# Altium PCB MainBoard.PcbDoc
Units mil, origin at the board's own origin, x right, y up, seen from the top; angles counter-clockwise.
Board outline 2900 x 5900 mil, 2 copper layers (Top Layer, Bottom Layer); 84 components, 82 nets, 403 pads, 125 vias.
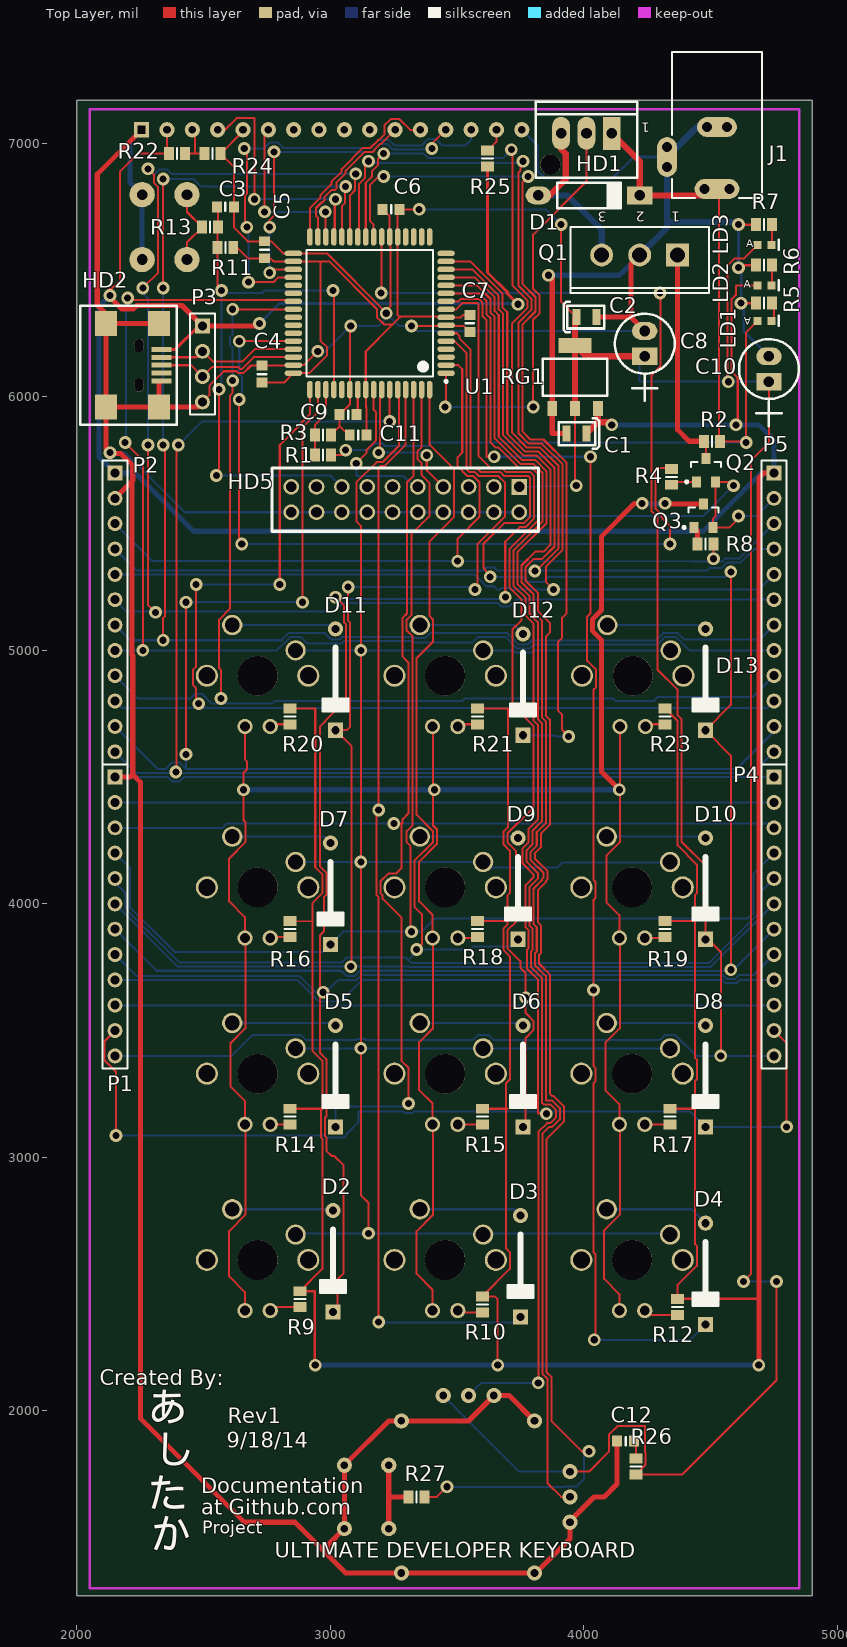
[diagram p0: Top Layer view]
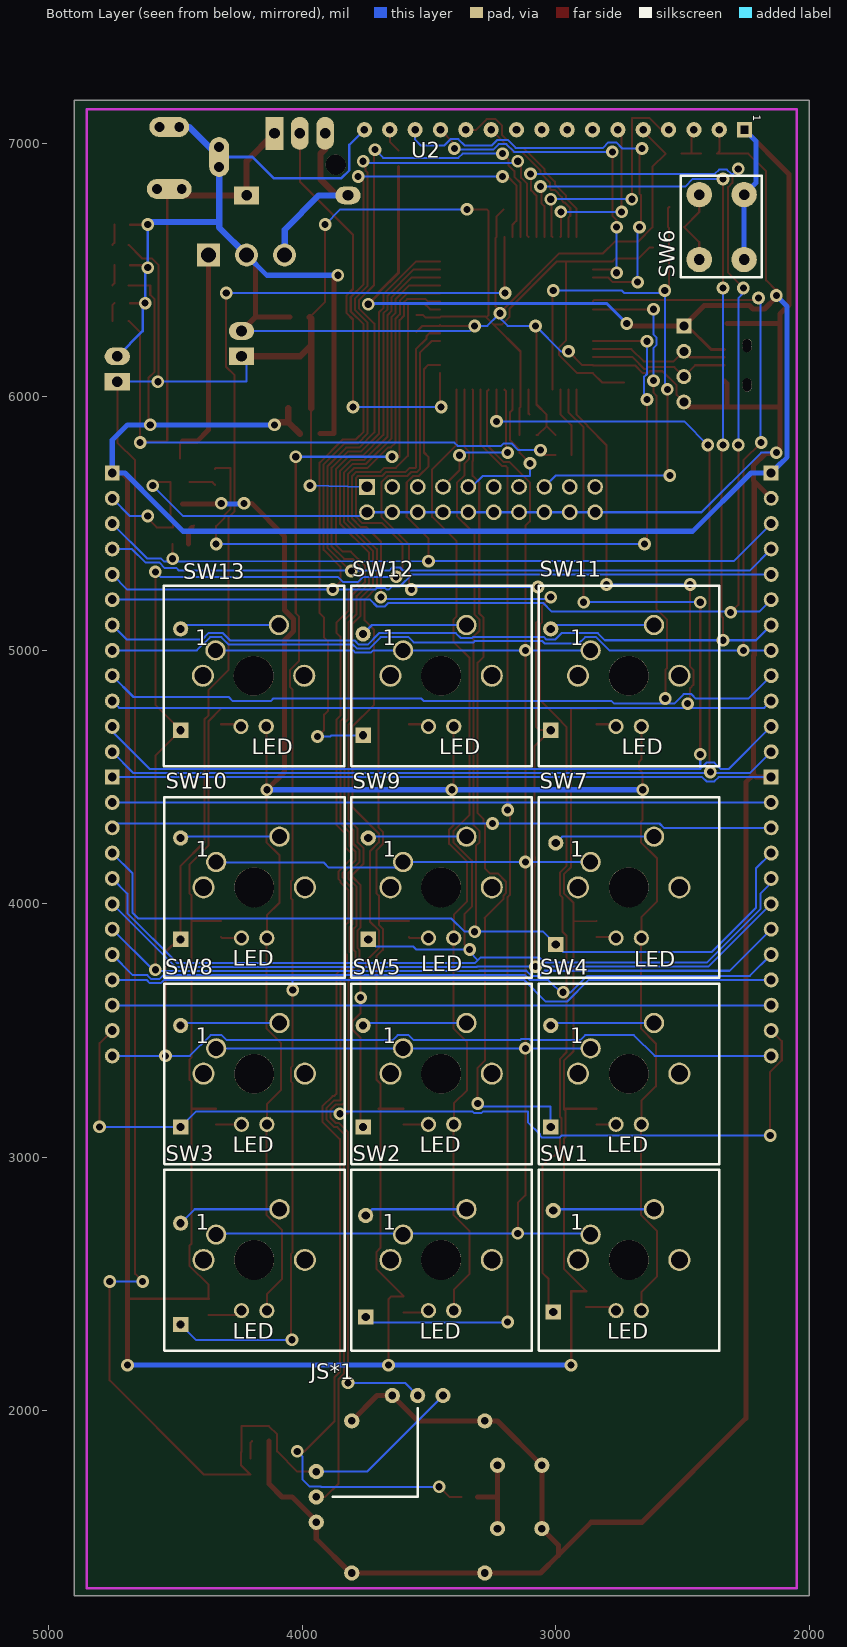
[diagram p1: Bottom Layer view, seen from below]

## Layer stack, top to bottom
Top Layer: signal copper 1.4
Dielectric: dielectric 12.6, FR-4, Dk 4.8
Bottom Layer: signal copper 1.4

## Board outline
2000,1270 4900,1270 4900,7170 2000,7170

## Design rules (kind name [scope] priority, off if disabled: settings)
Clearance [All] p1: gap=8
PolygonConnect [All] p1: connectstyle=Relief reliefconductorwidth=10 reliefentries=4 polygonreliefangle="90 Angle"
RoomDefinition MainBoard [InComponentClass('MainBoard')] p1: confinementstyle=ConfineIn formatcopy=TRUE lockcomponents=FALSE outline 4900,1270 2000,1270 2000,7170 4900,7170
RoutingVias [All] p1: holewidth=25 width=40 viastyle="Through Hole" minholewidth=28 minwidth=50 maxholewidth=28 maxwidth=50
SilkscreenOverComponentPads [All] p1: minsilkscreentomaskgap=10
SolderMaskExpansion [All] p1: expansion=4
Width [All] p1: maxlimit=25 minlimit=8 preferedwidth=8 minimp=50.000000 maximp=50.000000 favimp=50.000000
27 further rules are at their usual default settings.

## Components (designator, comment, footprint, x,y, rotation, side; value= is the part's Value field where it differs from the comment)
C1 "100UF_TANT_6.3V_0805" 100uF_6.3V_Tant_0805 3970,5855 r180 top
C2 "100UF_TANT_6.3V_0805" 100uF_6.3V_Tant_0805 4010,6315 r0 top
C3 "0.01UF_0603REFLOW" RC0603REFLOW-IPC 2585,6750 r0 top
C4 "0.01UF_0603REFLOW" RC0603REFLOW-IPC 2730,6090 r90 top
C5 "0.01UF_0603REFLOW" RC0603REFLOW-IPC 2740,6580 r90 top
C6 "0.01UF_0603REFLOW" RC0603REFLOW-IPC 3240,6740 r180 top
C7 "0.01UF_0603REFLOW" RC0603REFLOW-IPC 3550,6290 r270 top
C8 "10UF_RP_16V_100" CAP_100RP42_6MMDIA 4240,6160 r90 top
C9 "0.01UF_0603REFLOW" RC0603REFLOW-IPC 3070,5930 r180 top
C10 "10UF_RP_16V_100" CAP_100RP42_6MMDIA 4730,6060 r90 top
C11 "0.01UF_0603REFLOW" RC0603REFLOW-IPC 3110,5850 r180 top
C12 "0.01UF_0603REFLOW" RC0603REFLOW-IPC 4165,1880 r180 top
D1 "1N4001" DIODE400/70/42 4220,6795 r180 top
D2 "1N4148" DIODE400/60/32 3010,2390 r90 top
D3 "1N4148" DIODE400/60/32 3750,2370 r90 top
D4 "1N4148" DIODE400/60/32 4480,2340 r90 top
D5 "1N4148" DIODE400/60/32 3020,3120 r90 top
D6 "1N4148" DIODE400/60/32 3760,3120 r90 top
D7 "1N4148" DIODE400/60/32 3000,3840 r90 top
D8 "1N4148" DIODE400/60/32 4480,3120 r90 top
D9 "1N4148" DIODE400/60/32 3740,3860 r90 top
D10 "1N4148" DIODE400/60/32 4480,3860 r90 top
D11 "1N4148" DIODE400/60/32 3020,4685 r90 top
D12 "1N4148" DIODE400/60/32 3760,4665 r90 top
D13 "1N4148" DIODE400/60/32 4480,4685 r90 top
HD1 "HDR3PIN100SHRD" HDR3PIN100SHRD 4110,7040 r180 top
HD2 "USB-MINI_B" HD_USB_MINI_B 2245,6125 r270 top
HD5 "HDR,20PIN,2X10" HDR-20PIN-2X10 3745,5645 r180 top
J1 "PWR2.5" KLD-0202 4525,7360 r270 top
JS*1 "JoyStick" JOYSTICK 3280,1960 r270 bottom
LD1 "0603_RED" LED0603REFLOW-IPC-COLOR 4720,6300 r90 top
LD2 "0603_RED" LED0603REFLOW-IPC-COLOR 4720,6440 r90 top
LD3 "0603_RED" LED0603REFLOW-IPC-COLOR 4720,6600 r90 top
P1 "Header 12" HDR1X12 2150,4500 r270 top
P2 "Header 12" HDR1X12 2150,5700 r270 top
P3 "Header 4" HDR1X4 2495,6280 r270 top
P4 "Header 12" HDR1X12 4750,4500 r270 top
P5 "Header 12" HDR1X12 4750,5700 r270 top
Q1 "NPN_TRANSISTOR" SFM-T3/A6.6V 4220,6560 r180 top
Q2 "NPN_TRANSISTOR" SOT23-3 4445,5665 r90 top
Q3 "NPN_TRANSISTOR" SOT23-3 4435,5485 r90 top
R1 "Res Semi" RESC2012L 2970,5770 r0 top
R2 "Res Semi" RESC2012L 4505,5825 r0 top
R3 "Res Semi" RESC2012L 2970,5850 r180 top
R4 "Res Semi" RESC2012L 4345,5685 r270 top
R5 "Res Semi" RESC2012L 4710,6370 r0 top
R6 "Res Semi" RESC2012L 4710,6520 r0 top
R7 "Res Semi" RESC2012L 4710,6680 r0 top
R8 "Res Semi" RESC2012L 4480,5420 r180 top
R9 "Res Semi" RESC2012L 2880,2440 r270 top
R10 "Res Semi" RESC2012L 3600,2420 r270 top
R11 "Res Semi" RESC2012L 2585,6590 r0 top
R12 "Res Semi" RESC2012L 4370,2410 r270 top
R13 "Res Semi" RESC2012L 2525,6670 r180 top
R14 "Res Semi" RESC2012L 2840,3160 r270 top
R15 "Res Semi" RESC2012L 3600,3160 r270 top
R16 "Res Semi" RESC2012L 2840,3900 r270 top
R17 "Res Semi" RESC2012L 4340,3160 r270 top
R18 "Res Semi" RESC2012L 3580,3900 r270 top
R19 "Res Semi" RESC2012L 4320,3900 r270 top
R20 "Res Semi" RESC2012L 2840,4740 r270 top
R21 "Res Semi" RESC2012L 3580,4740 r270 top
R22 "Res Semi" RESC2012L 2395,6960 r180 top
R23 "Res Semi" RESC2012L 4320,4740 r270 top
R24 "Res Semi" RESC2012L 2535,6960 r180 top
R25 "Res Semi" RESC2012L 3620,6940 r270 top
R26 "Res Semi" RESC2012L 4205,1780 r270 top
R27 "Res Semi" RESC2012L 3340,1660 r0 top
RG1 "LM1117SPX-3.3_SOT223" SOT223REFLOW 3965,5955 r0 top
SW1 "CherrySwitch" CherryMxSwitch 2862.5,2695 r180 bottom
SW2 "CherrySwitch" CherryMxSwitch 3602.5,2695 r180 bottom
SW3 "CherrySwitch" CherryMxSwitch 4340,2695 r180 bottom
SW4 "CherrySwitch" CherryMxSwitch 2862.5,3430 r180 bottom
SW5 "CherrySwitch" CherryMxSwitch 3602.5,3430 r180 bottom
SW6 "SW-PCB-4P-6MM" SW-PCB-4PIN 2345,6670 r90 bottom
SW7 "CherrySwitch" CherryMxSwitch 2862.5,4165 r180 bottom
SW8 "CherrySwitch" CherryMxSwitch 4340,3430 r180 bottom
SW9 "CherrySwitch" CherryMxSwitch 3602.5,4165 r180 bottom
SW10 "CherrySwitch" CherryMxSwitch 4340,4165 r180 bottom
SW11 "CherrySwitch" CherryMxSwitch 2862.5,5000 r180 bottom
SW12 "CherrySwitch" CherryMxSwitch 3602.5,5000 r180 bottom
SW13 "CherrySwitch" CherryMxSwitch 4342.5,5000 r180 bottom
U1 "ATSAMD21J" 64A_N 3155,6330 r180 top
U2 "HD44780" HD44780 2255,7054 r270 bottom

## Footprints (in the part's own frame and the unit in brackets; to place one, negate y for a bottom-side part, rotate by r counter-clockwise, add the part's x,y. Pads: shape width x height; smd on the part's side, far side on the other; paste and mask are expansions set on the pad)
64A_N [mm] "64-Pin Thin Quad Flat Pack 0.8 mm Pitch, IPC Medium Density"
  oval 1.75x0.55 smd: 1(-7.65,6) 2(-7.65,5.2) 3(-7.65,4.4) 4(-7.65,3.6) 5(-7.65,2.8) 6(-7.65,2) 7(-7.65,1.2) 8(-7.65,0.4) 9(-7.65,-0.4) 10(-7.65,-1.2) 11(-7.65,-2) 12(-7.65,-2.8) 13(-7.65,-3.6) 14(-7.65,-4.4) 15(-7.65,-5.2) 16(-7.65,-6) 33(7.65,-6) 34(7.65,-5.2) 35(7.65,-4.4) 36(7.65,-3.6) 37(7.65,-2.8) 38(7.65,-2) 39(7.65,-1.2) 40(7.65,-0.4) 41(7.65,0.4) 42(7.65,1.2) 43(7.65,2) 44(7.65,2.8) 45(7.65,3.6) 46(7.65,4.4) 47(7.65,5.2) 48(7.65,6)
  oval 0.55x1.75 smd: 17(-6,-7.65) 18(-5.2,-7.65) 19(-4.4,-7.65) 20(-3.6,-7.65) 21(-2.8,-7.65) 22(-2,-7.65) 23(-1.2,-7.65) 24(-0.4,-7.65) 25(0.4,-7.65) 26(1.2,-7.65) 27(2,-7.65) 28(2.8,-7.65) 29(3.6,-7.65) 30(4.4,-7.65) 31(5.2,-7.65) 32(6,-7.65) 49(6,7.65) 50(5.2,7.65) 51(4.4,7.65) 52(3.6,7.65) 53(2.8,7.65) 54(2,7.65) 55(1.2,7.65) 56(0.4,7.65) 57(-0.4,7.65) 58(-1.2,7.65) 59(-2,7.65) 60(-2.8,7.65) 61(-3.6,7.65) 62(-4.4,7.65) 63(-5.2,7.65) 64(-6,7.65)
  silkscreen extent -7.78,-6.35 6.35,6.95, body extent -7,-7 7,7, height 1.2
100uF_6.3V_Tant_0805 [mm] "100uF 6.3V Tantalum 0805 package"
  rect 0.8x1.6 smd: 1(-1,0) 2(1,0)
  silkscreen extent -2.29,-1.52 1.78,1.52
CAP_100RP42_6MMDIA [mil]
  rect 70x100 hole 42: 1(0,0)
  oval 70x100 hole 42: 2(100,0)
  silkscreen extent -175,-118 168,118
CherryMxSwitch [mil] "Cherry Mx Switch with holes for LED"
  round 80 hole 59: 1(0,0) 2(250,100)
  round 60 hole 39: 3(100,-300) 4(200,-300)
  round 87 hole 67: 5(-50,-100) 7(350,-100)
  round 157 hole 157 unplated: 6(150,-100)
  silkscreen extent -205,-458 508,255
DIODE400/60/32 [mil]
  rect 60x60 hole 32: 1(0,0)
  round 60 hole 32: 2(400,0)
  silkscreen extent 75,-50 325,50
DIODE400/70/42 [mil]
  rect 100x70 hole 42: 1(0,0)
  oval 100x70 hole 42: 2(400,0)
  silkscreen extent 75,-50 325,50
HD44780 [mil] "HD44780 Display"
  rect 60x60 hole 30 square: 1(0,0)
  round 60 hole 30: 2(0,-100) 3(0,-200) 4(0,-300) 5(0,-400) 6(0,-500) 7(0,-600) 8(0,-700) 9(0,-800) 10(0,-900) 11(0,-1000) 12(0,-1100) 13(0,-1200) 14(0,-1300) 15(0,-1400) 16(0,-1500)
HD_USB_MINI_B [mm]
  rect 0.5x2 smd: 1(-1.6,2.25) 2(-0.8,2.25) 3(0,2.25) 4(0.8,2.25) 5(1.6,2.25)
  rect 2.5x2.2 smd: 6(-4.2,2) 7(4.2,2) 8(-4.2,-3.3) 9(4.2,-3.3)
  round 0.9 hole 0.9 unplated: 10(-1.75,0) 11(-2.2,0) 12(1.75,0) 13(2.2,0)
  Top Layer pour cut-out: -1.75,-0.45 -3.85,-0.45 -3.85,-6.5 3.85,-6.5 3.85,-0.45 1.75,-0.45 1.75,1.2 -1.75,1.2
  silkscreen extent -5.95,-5.9 5.95,3.75, body extent -5.35,-6.5 5.35,2.7, height 3.95
HDR1X4 [mm] "Connector; Header; 4 Position"
  rect 1.5x1.5 hole 0.9: 1(0,0)
  round 1.5 hole 0.9: 2(2.54,0) 3(5.08,0) 4(7.62,0)
  silkscreen extent -1.27,-1.27 8.89,1.27
HDR1X12 [mm] "Connector; Header; 12 Position"
  rect 1.5x1.5 hole 0.9: 1(0,0)
  round 1.5 hole 0.9: 2(2.54,0) 3(5.08,0) 4(7.62,0) 5(10.16,0) 6(12.7,0) 7(15.24,0) 8(17.78,0) 9(20.32,0) 10(22.86,0) 11(25.4,0) 12(27.94,0)
  silkscreen extent -1.27,-1.27 29.21,1.27
HDR3PIN100SHRD [mil]
  rect 70x130 hole 42: 1(0,0)
  oval 70x130 hole 42: 2(100,0) 3(200,0)
  round 80 hole 80 unplated: 4(242,124)
  silkscreen extent -100,-125 300,175, body extent -92,-138 292,175, height 400
HDR-20PIN-2X10 [mil]
  rect 62x62 hole 42: 1(0,0)
  round 62 hole 42: 2(0,100) 3(100,0) 4(100,100) 5(200,0) 6(200,100) 7(300,0) 8(300,100) 9(400,0) 10(400,100) 11(500,0) 12(500,100) 13(600,0) 14(600,100) 15(700,0) 16(700,100) 17(800,0) 18(800,100) 19(900,0) 20(900,100)
  silkscreen extent -75,-75 975,175
JOYSTICK [mil] "Joystick with 2 axis, and 1 push button."
  round 60 hole 30: 1(-100,-165) 2(-100,-265) 3(-100,-365) 4(200,-665) 5(300,-665) 6(400,-665) 7(175,50) 8(425,50) 9(175,225) 10(425,225) 11(600,-525) 12(600,0) 13(0,0) 14(0,-525)
  silkscreen extent -50,-600 300,-265
KLD-0202 [mm] "DC Power Jack, 2.5mm, KLD Series, PCB Mount"
  oval 2x4.5 all layers, no hole: 1(13.7,0)
  round 1.5 hole 1: 1A(13.7,-1.25) 1B(13.7,1.25) 2A(7.5,-1) 2B(7.5,1) 3A(9.5,-5) 3B(11.5,-5)
  oval 2x4 all layers, no hole: 2(7.5,0)
  oval 4x2 all layers, no hole: 3(10.5,-5)
  silkscreen extent 0,-4.5 14.6,4.5
LED0603REFLOW-IPC-COLOR [mm]
  rect 0.8x0.8 smd: 1(0,-0.525) 2(0,0.875)
  silkscreen extent -0.5,-1.25 0.5,-1.25
RC0603REFLOW-IPC [mil]
  rect 39x43 smd: 1(-33,0) 2(34,0)
  silkscreen extent 0,-16 0,16
RESC2012L [mm] "Chip Resistor, Body 2.0x1.3mm, IPC High Density"
  rect 1x1.3 smd: 1(-0.8,0) 2(0.8,0)
  silkscreen extent 0,-0.55 0,0.55, body extent -1.07,-0.7 1.07,0.7, height 2.54
SFM-T3/A6.6V [mm] "TO, Thru-Hole, Vertical, Heatsink Mounted; 3 In-Line Leads; Pitch 3.81 mm"
  rect 2.3x2.3 hole 1.5: 1(-3.81,0)
  round 2.3 hole 1.5: 2(0,0) 3(3.81,0)
  silkscreen extent -6.95,-2.8 6.95,3.8
SOT23-3 [mm] "SOT23, 3-Leads, Body 3.0x2.8mm (max), Pitch 0.95mm, IPC Medium Density"
  rect 1.1x0.9 smd: 1(0,0) 2(0,-1.9) 3(2.36,-0.95)
  silkscreen extent -0.12,-2.45 1.98,1.12, body extent 0.38,-2.47 1.98,0.57, height 1.4
SOT223REFLOW [mil]
  rect 39x59 smd: 1(-90,0) 2(0,0) 3(90,0)
  rect 129x59 smd: 4(0,248)
  silkscreen extent -128,50 128,195
SW-PCB-4PIN [mil]
  round 100 hole 42: 1(-128,-88) 2(128,-88) 3(128,89) 4(-128,89)
  silkscreen extent -198,-158 202,162

## Part data
C1 C2 C3 C4 C5 C6 C7 C8 C9 C10 C11 C12: "Capacitor"
D1: "Diode"
D2 D3 D4 D5 D6 D7 D8 D9 D10 D11 D12 D13: library part 5283, "Diode, 1N4148, 75V, 0.4 in., DO-35, 150mA, Switching, 500mW, Any"
HD1: library part 1767, "Header, 0.100 in., 3 pin Pins, Shrouded, AMP: 644486-3"
HD2: "Header"
J1: "Low Voltage Power Supply Connector"
LD1 LD2 LD3: "LED"
P1 P2 P4 P5: "Header, 12-Pin"
P3: "Header, 4-Pin"
Q1 Q2 Q3: library part 265442, "Transistor, MMBT4401, 40V, SOT23-3, 500mA, NPN, Transistor, On Semi: MMBT4401LT1"
R1 R2 R3 R4 R5 R6 R7 R8 R9 R10 R11 R12 R13 R14 R15 R16 R17 R18 R19 R20 R21 R22 R23 R24 R25 R26 R27: "Semiconductor Resistor"
RG1: "Regulator"
SW1 SW2 SW3 SW4 SW5 SW7 SW8 SW9 SW10 SW11 SW12 SW13: "Cherry MX Switch layout"
SW6: "Switch"

## Via types
v1: diameter 50, hole 28, Top Layer to Bottom Layer, 125 vias

## Nets (pads, with @x,y where several pads share a name; then routed paths per layer and width w, separated by ;. In a path a pad name is that pad's centre, name@x,y a point inside that pad or via, vN(x,y) a via of type N, cw(c..) or ccw(c..) an arc to the next point about the centre after c; other vN are vias at no path point)
12V_SENSE: R1.1 R3.2 U1.51 | length 276.7
  Top Layer w8: R1.1 R3.2 2938.5,5888.5 2981.77,5931.77 U1.51
+3.3: C2.1 C4.1 C5.1 C6.1 C7.1 C8.1 C10.1 C11.1 HD5.1 JS*1.1 JS*1.4 LD3.2 R11.2 R26.2 RG1.2 RG1.4 U1.8 U1.21 U1.34 U1.48 U1.56 | length 12224.6
  Top Layer w8: R11.2 2630,6590 2673,6547 2763,6547 2775.28,6534.72 U1.34 2960,6534.72 ; C4.1 2817.04,6057 U1.48 2916.11,6093.78 2987,6164.67 2987,6195.33 2960,6222.33 2960,6534.72 ; C11.1 3143,5957 3140,5960 3140,6028.07 U1.56 3139.25,6179.25 3246.34,6286.34 ; v1(3350,6740) C6.1 3265.24,6732.24 U1.21 3265.24,6323.27 3274.25,6314.25 ; C7.1 3523,6323 3514.25,6314.25 U1.8 3453.43,6317 3277,6317 3274.25,6314.25 ; v1(3910,6680) 3910,6375.63 C2.1 ; JS*1.4 4020,1760 4099.5,1839.5 4099.5,1906.47 4132.53,1939.5 4240.5,1939.5 4240.5,1838.24 4242.59,1836.15 4242.59,1786.09 R26.2 4388.5,1748.5 4760,2120 v1(4760,2510) ; RG1.2 3965,5655 v1(3970,5650) ; v1(4570,6060) 4567,6063 4567,6519.33 4594.67,6547 4632.55,6547 LD3.2 ; v1(4630,2510) 4660,2540 4660,5750 4730,5820 C10.1 ; 2960,6534.72 2995.28,6534.72 3183,6347 3183,6314.67 3211.33,6286.34 3246.34,6286.34 ; 3246.34,6286.34 3274.25,6314.25
  Top Layer w25: RG1.2 RG1.4 ; C2.1 3965,6309.37 RG1.4 ; C8.1 4008,6160 RG1.4
  Bottom Layer w8: v1(3350,6740) 3850,6740 v1(3910,6680) ; JS*1.1 3745,1760 JS*1.4 ; HD5.1 v1(3970,5650) ; C8.1 4220,6140 4220,6060 v1(4570,6060) C10.1 ; v1(4630,2510) v1(4760,2510)
+5: C1.1 HD2.1 LD2.2 P2.1 P3.1 P5.1 R9.1 R10.1 R12.1 R14.1 R15.1 R16.1 R17.1 R18.1 R19.1 R20.1 R21.1 R22.2 R23.1 R25.2 RG1.3 U2.2 | length 22904.3
  Top Layer w8: v1@2130,6420 2170,6460 2170,6890 2240,6960 R22.2 2355,6968.5 U2.2 ; R14.1 2966.5,3191.5 2968,3190 ; R16.1 2930,3930 ; R20.1 2841.5,4770 2940,4770 2940,4143.99 2968,4115.99 2968,4042.01 2930,4004.01 2930,3418.99 2968,3380.99 2968,3190 ; R9.1 2968,2559.5 2968,3072.4 2962,3078.4 2962,3184 2968,3190 ; R18.1 3696.5,3931.5 3698,3930 ; R21.1 3581.5,4770 3700,4770 3700,4302.02 3682,4284.02 3682,4235.98 3708,4209.98 3708,4042.01 3698,4032.01 3698,3930 ; R15.1 3698.5,3191.5 ; v1(3660,2180) 3660,2440 3648.5,2451.5 R10.1 3708,2559.5 3708,2625.99 3692,2641.99 3692,3291.01 3708,3307.01 3708,3792.4 3682,3818.4 3682,3901.6 3698,3917.6 3698,3930 ; R19.1 4436.5,3931.5 ; R23.1 4370,4721.5 4370,4230.54 4445.5,4155.04 4445.5,4042.01 4438,4034.51 4438,3393 4445.5,3385.5 4445.5,3307.01 4438,3299.51 4438,3190 ; R17.1 4436.5,3191.5 4438,3190 ; R12.1 4370,2496.51 4445.5,2572.01 4445.5,2650.5 4438,2658 4438,3190 ; v1(4600,5890) 4607,5897 4607,6075.33 4583,6099.33 4583,6385.33 4600,6402.33 4600,6440 LD2.2
  Top Layer w10: R9.1 2938.5,2471.5 v1@2938.5,2181.5 ; R12.1 4688.5,2441.5 4690,2440
  Top Layer w12: HD2.1 2387.99,6187.99 2480,6280 P3.1 ; R25.2 3620,6491.22 3699.36,6411.86 ; 3697.5,6408.14 v1(3740,6365.65)
  Top Layer w20: v1@2130,6420 2130,6393.41 2176.41,6347 2222.01,6347 2235.76,6360.75 2414.25,6360.75 P3.1 2710,6280 v1(2720,6290) ; v1@2938.5,2181.5 v1(2940,2180) ; v1(4690,2180) 4690,2440 4690,5680 4710,5700 P5.1
  Top Layer w25: C1.1 4055,5900.63 ; RG1.3 4055,5900.63 ; v1(4110,5890) 4099.37,5900.63 4055,5900.63
  Bottom Layer w12: v1(2720,6290) 2799,6369 3736.65,6369 v1(3740,6365.65)
  Bottom Layer w20: v1(2130,6400) 2087,6357 2087,5762.19 2112.19,5737 2113,5737 P2.1 2230,5700 2460,5470 4470.81,5470 4633,5632.19 4633,5633 4700,5700 P5.1 4750,5830 4690,5890 v1(4600,5890) v1(4110,5890) ; v1(2940,2180) v1(4690,2180)
+12: D1.1 HD1.1 J1.1 J1.1A J1.1B LD1.2 R1.2 R2.2 | length 3863.2
  Top Layer w8: R1.2 v1@3060,5770 ; J1.1 4533,6812.63 4533,5828.5 R2.2 v1@4635,5825 ; v1(4640,5820) 4640,6254.45 LD1.2
  Top Layer w25: HD1.1 4220,6930 D1.1 4499.37,6795 J1.1
  Bottom Layer w8: v1(3060,5790) 3147.67,5790 3174.67,5817 3205.33,5817 3215.33,5807 3387,5807 3400,5820 v1(4640,5820)
BACKLIGHTPWM: P2.3 P5.3 R8.1 U1.2 | length 3702
  Top Layer w8: U1.2 3504.72,6125.28 3520,6110 3520,5780.81 3502,5762.81 3502,5726.18 3540.18,5688 3562.81,5688 3588,5662.81 3588,5527.19 3502,5441.19 v1(3502,5352) ; v1(4511.5,5361.5) R8.1
  Bottom Layer w8: P2.3 2298,5352 v1(3502,5352) 4430,5350 4545.05,5350 4558.05,5363 4613,5363 P5.3
D+: HD2.3 P3.3 U1.46 | length 576.7
  Top Layer w8: HD2.3 2450,6125 P3.3 2532.25,6117.25 2636.21,6117.25 2643.46,6110 2650,6110 2696.77,6156.77 U1.46
D-: HD2.2 P3.2 U1.45 | length 566.5
  Top Layer w8: HD2.2 2471.5,6156.5 P3.2 2535,6140 2653.46,6140 2701.73,6188.27 U1.45
ENABLE_LCD: U1.30 U2.6 | length 669.8
  Top Layer w8: v1(2740,6730) 2740,7039 U2.6 ; v1(2980,6730) 2980,6632.95 U1.30
  Bottom Layer w8: v1(2740,6730) v1(2980,6730)
FAN_EN: R4.1 U1.44 | length 3103.8
  Top Layer w8: v1(2640,5990) 2640,5430 v1(2650,5420) ; v1(2640.24,6219.76) U1.44 ; v1(4340,5420) 4340,5490 4306.5,5523.5 4306.5,5534.55 4283,5558.05 4283,5720 4341.5,5720 R4.1
  Bottom Layer w8: v1(2640,5990) 2651.25,6001.25 2651.25,6079.58 2640.24,6090.59 v1(2640.24,6219.76) ; v1(2650,5420) v1(4340,5420)
FAN_PWM: HD1.2 U1.1 | length 1678.3
  Top Layer w8: v1(3452.36,5960) 3456.18,5956.18 U1.1 ; v1(3800,5960) 3800,6305.44 3825,6330.44 3825,6400.85 3800,6425.85 3800,6640 4010,6850 HD1.2
  Bottom Layer w8: v1(3452.36,5960) v1(3800,5960)
GND: C1.2 C2.2 C3.2 C4.2 C5.2 C6.2 C7.2 C8.2 C9.2 C10.2 C11.2 C12.2 HD2.5 HD2.6 HD2.7 HD2.8 HD2.9 HD5.2 HD5.4 HD5.6 HD5.8 HD5.10 HD5.12 HD5.14 HD5.16 HD5.18 HD5.20 J1.2 J1.2A J1.2B J1.3 J1.3A J1.3B JS*1.3 JS*1.6 JS*1.9 JS*1.10 JS*1.11 JS*1.12 JS*1.13 JS*1.14 P1.1 P2.2 P3.4 P4.1 P5.2 Q1.2 Q2.2 Q3.2 R3.1 R5.1 R6.1 R7.1 R24.1 RG1.1 SW6.1 SW6.2 U1.7 U1.22 U1.33 U1.47 U1.54 U2.1 U2.5 U2.16 | length 24613.7
  Top Layer w8: P3.4 2523,6008 2523,6045.33 2578.93,6101.25 2629.58,6101.25 2636.83,6094 2656.63,6094 2686.63,6124 C4.2 2852.54,6124 U1.47 2895.28,6125.28 v1(2950,6180) ; U2.5 2655,7048.5 R24.1 2619,6907.5 C3.2 2619,6668.67 2673.67,6614 C5.2 2766,6614 2813.78,6566.22 U1.33 2986.41,6566.22 3216.31,6336.31 3237,6357 3237,6627.92 U1.22 3233.74,6712.26 C6.2 ; R3.1 3036,5884.5 ; C11.2 3070.5,5850 3036,5884.5 ; v1(3080,6280) 3076.26,6276.26 U1.54 3076.26,5970.26 C9.2 3036,5884.5 ; v1(3320,6280) 3453.43,6280 U1.7 3458.94,6280 3526,6280 C7.2 ; v1(4590,5650) 4575,5665 Q2.2 4519.8,5529.8 4509.8,5519.8 Q3.2 4575,5485 4620,5530 v1(4610,5530)
  Top Layer w10: v1(4610,6510) 4620,6520 R6.1 ; v1(4610,6680) R7.1 ; v1(4620,6370) R5.1
  Top Layer w20: P1.1 2210,4500 2220,4510 ; P2.2 2217,5667 ; U2.1 2080,6879 2080,6363 2115.08,6327.92 HD2.8 ; HD2.6 HD2.8 ; HD2.5 2323.74,6052.17 HD2.7 ; P3.4 2474.65,5959.65 HD2.7 ; JS*1.14 3705,2060 JS*1.3 3545,1960 JS*1.13 3230,1960 JS*1.9 JS*1.10 2990,1470 2990,1430 ; v1(3860,6480) 3875,6465 RG1.1 3875,5855 C1.2 ; C2.2 4185,6315 ; C12.2 4131,1711 4080,1660 4040,1660 3945,1565 3945,1495 3810,1360 JS*1.11 JS*1.12 3060,1360 2990,1430 ; Q1.2 4185,6525 4185,6315 ; C8.2 4185,6315 ; HD2.9 HD2.7 ; HD2.9 HD2.8 ; HD2.9 2115.08,5794.92 v1(2130,5780) 2133,5777 2173,5777 2220,5730 2220,5670 2217,5667 ; 2217,5667 2217,4982.19 2220,4979.19 2220,4510 ; 2220,4510 2250,4480 2250,1970 2660,1560 2860,1560 2990,1430
  Bottom Layer w8: v1(2130,5780) 2190,5780 2425,5545 HD5.20 HD5.2 3760,5530 4470,5530 v1(4590,5650) ; P1.1 2357.67,4500 2374.67,4483 2405.33,4483 2422.33,4500 P4.1 ; v1(2950,6180) 2980,6180 v1(3080,6280) 3190,6280 v1@3230,6320 ; C8.2 3340,6260 v1(3320,6280) 3270,6280 v1@3230,6320 ; v1(4610,5530) 4680,5530 P5.2 ; v1@3230,6320 v1(3220,6330) 3240,6330 v1@3230,6320
  Bottom Layer w10: U2.16 3815,6994 3815,6894.05 3846.05,6863 4113,6863 4196.61,6946.61 J1.3 ; v1(4610,6510) v1(4610,6680) ; v1@4620,6500 v1(4620,6370) 4630,6360 4630,6260 C10.2
  Bottom Layer w20: U2.1 2210,7009 2210,6845 SW6.2 SW6.1 ; v1(3860,6480) 4140,6480 Q1.2
  Bottom Layer w25: Q1.2 4328.15,6668.15 4328.15,6690 ; J1.2 J1.2A 4446.26,7064.72 J1.3 J1.3B 4328.15,6690 ; v1(4610,6680) 4600,6690 4328.15,6690
JOYSTICK_ADC1: JS*1.2 U1.13 | length 5160.9
  Top Layer w8: U1.13 3568.78,6471.73 3647.5,6393.01 3647.5,6339.29 3664,6322.79 3664,5843.58 3755.58,5752 3807.48,5752 3852,5707.48 3852,5500.68 3737.69,5386.37 3737.69,5262.11 3786,5213.79 3786,5143.65 3818,5111.65 3818,4729.23 3834,4713.23 3834,4325.25 3798,4289.25 3798,4235.98 3774.09,4212.07 3774.09,4165.7 3818,4121.79 3818,4099.25 3786,4067.25 3786,3913.6 3798,3901.6 3798,3818.4 3791,3811.4 3791,3751.42 3834,3708.42 3834,3216 3841,3209 3867.33,3209 3889,3187.33 3889,3156.67 3867.33,3135 3855,3135 3820,3100 v1(3820,2110)
  Bottom Layer w8: JS*1.2 3595,2110 v1(3820,2110)
JOYSTICK_ADC2: JS*1.5 U1.14 | length 5440.2
  Top Layer w8: U1.14 3559.91,6503.23 3663.5,6399.63 3663.5,6345.92 3680,6329.42 3680,5850.21 3762.21,5768 3814.11,5768 3868,5714.11 3868,5416.63 3841.06,5389.69 3808.43,5389.69 3753.69,5334.94 3753.69,5268.73 3802,5220.42 3802,5150.28 3834,5118.28 3834,4735.85 3850,4719.85 3850,4318.63 3814,4282.63 3814,4229.35 3790.09,4205.44 3790.09,4172.33 3840.9,4121.52 3840.9,4104.27 3834,4097.37 3834,4092.63 3802,4060.63 3802,3920.23 3814,3908.23 3814,3811.77 3807,3804.77 3807,3758.05 3850,3715.05 3850,3225 3873.95,3225 3905,3193.95 3905,3150.05 3873.95,3119 3861.63,3119 3836,3093.37 3836,2146.33 3857,2125.33 3857,1940 ; 3857,1937 3857,1940 ; JS*1.5 3910,1660 3857,1713 3857,1940
JOYSTICK_PRESS: R27.2 U1.15 | length 6081.9
  Top Layer w8: R27.2 3420,1660 v1(3460,1700) ; U1.15 3551.04,6534.72 3679.5,6406.26 3679.5,6352.54 3697.59,6334.46 3697.59,5855.24 3768.84,5784 3820.73,5784 3884,5720.73 3884,5410 3834.85,5360.85 3802.22,5360.85 3769.69,5328.32 3769.69,5275.36 3818,5227.05 3818,5156.91 3866,5108.91 3866,5070 3850,5054 3850,4742.48 3866,4726.48 3866,4312 3830,4276 3830,4222.72 3806.09,4198.81 3807,4197.91 3807,4178.05 3856.9,4128.15 3856.9,4097.64 3850,4090.75 3850,4086 3818,4054 3818,3926.85 3830,3914.85 3830,3805.15 3823,3798.15 3823,3764.67 3866,3721.67 3866,3250 3875,3241 3880.58,3241 3921,3200.58 3921,3141 3852,3072 3852,2152.95 3873,2131.95 3873,1958.5 3991.5,1840 v1(4020,1840)
  Bottom Layer w8: v1(3460,1700) 3925.6,1700 3927.6,1702 3972,1702 4000,1730 4000,1820 v1(4020,1840)
KEYINPUT0: D3.1 P1.2 P4.2 U1.61 | length 6942.5
  Top Layer w8: v1(3190,2350) 3190,4026.38 3181,4035.38 3181,4361 v1(3190,4370) 3190,5720 3197,5727 3211.95,5727 3296.73,5811.78 U1.61
  Bottom Layer w8: P1.2 3180,4400 ; v1@3190,2348 3728,2348 D3.1 ; v1(3190,4370) 3180,4380 3180,4400 ; P4.2 3180,4400
KEYINPUT1: D5.1 P1.3 P4.3 U1.62 | length 5985.8
  Top Layer w8: v1(3250,4317) 3281.5,4317 ; v1@3308,3202 v1(3308,3212) 3308,3352.99 3280,3380.99 3280,3945 3281,3945 3206,4020 3206,4033.01 3197,4042.01 3197,4087.99 3229.51,4120.5 3260.5,4120.5 3280,4140 3280,4315 3284.5,4319.5 3284.5,4334.5 3308,4358 3308,4952 3284.5,4975.5 3284.5,5128.17 3302,5145.67 3302,5662.81 3328.23,5689.04 3328.23,5746.82 3327,5748.05 3327,6027.59 U1.62
  Bottom Layer w8: P1.3 2573.96,4300 2590.96,4317 v1(3250,4317) 4733,4317 P4.3 ; D5.1 3020,3200 3296,3200 v1(3308,3212)
KEYINPUT2: D7.1 P1.4 P4.4 U1.63 | length 5331.5
  Top Layer w8: v1@3324,3894 3315,3903 3315,4228.96 3300.5,4243.46 3300.5,4286.54 3324,4310.04 3324,5054.96 3300.5,5078.46 3300.5,5121.54 3320,5141.04 3320,5460 3362,5502 ; U1.63 3359.72,5802.05 3343,5785.33 3343,5754.67 3359.72,5737.95 3359.72,5691.09 3390,5660.81 3390,5529.19 3362.81,5502
  Bottom Layer w8: P1.4 2210,4140 2210,3985.25 2385.25,3810 2970,3810 D7.1 3050,3890 v1(3320,3890) 3360,3890 3412.1,3942.1 4646.85,3942.1 4670,3965.25 4670,4120 P4.4
KEYINPUT3: D9.1 P1.5 P4.5 U1.64 | length 5855.2
  Top Layer w8: v1(3340,3820) 3360.5,3840.5 3360.5,3959.5 3331,3989 3331,4169.96 3404.5,4243.46 3404.5,4286.54 3340,4351.04 3340,4970 3404.5,5034.5 3404.5,5121.54 3391.22,5134.82 3391.22,5430.41 3488,5527.19 3488,5714.33 3391.22,5811.11 U1.64
  Bottom Layer w8: P1.5 2150,4083.06 2191.53,4041.53 2191.53,3981.1 2404.63,3768 3043.67,3768 3064.67,3789 3296.05,3789 3307.09,3777.96 ; D9.1 3712,3832 3563.37,3832 3551.37,3820 v1(3340,3820) 3340,3810.87 3307.09,3777.96 ; P4.5 4690,4040 4690,3962.63 4494.37,3767 3318.05,3767 3307.09,3777.96
KEYINPUT4: D11.1 P1.6 P4.6 U1.5 | length 6112.6
  Top Layer w8: v1(3070,5250) 3070,5117.02 3078,5109.02 3078,4698 3065,4685 D11.1 3084,4621 3084,4186.33 3083,4185.33 3083,4149.67 3084,4148.67 v1@3084,3752 ; U1.5 3490.24,6219.76 3536,6174 3536,5714.81 3546.81,5704 3569.44,5704 3585.44,5688 3662.81,5688 3688,5662.81 3688,5527.19 3580,5419.19 3580,5250 v1(3570,5240)
  Bottom Layer w8: P1.6 2398,3752 v1(3080,3752) 3310.42,3752 3311.42,3751 4501,3751 P4.6 ; v1(3070,5250) 3580,5250 v1(3570,5240)
KEYINPUT5: D13.1 P1.7 P4.7 U1.6 | length 6800.1
  Top Layer w8: U1.6 3498.74,6251.26 3510,6240 3510,6230 3552,6188 3552,5721.44 3553.44,5720 3576.07,5720 3592.07,5704 3669.44,5704 3685.44,5688 3780.97,5688 3788,5680.97 3788,5527.19 3762.81,5502 3685.44,5502 3604,5420.56 3604,5326 v1(3630,5290) ; v1(4580,3740) 4580,4585 D13.1 4580,4785 v1(4580,5310) ; v1(3630,5290) 3620,5296.99 3626.99,5290 v1(3630,5290)
  Bottom Layer w8: P1.7 2314,3736 3043.67,3736 3064.67,3715 3095.33,3715 3116.33,3736 3303.79,3736 3304.79,3735 4585,3735 P4.7 ; v1(4580,5310) 4560,5290 3860,5290 3840,5270 3780,5270 3760,5290 v1(3630,5290) ; v1(3630,5290) 3620,5296.99 3626.99,5290 v1(3630,5290)
KEYINPUT6: D2.1 P1.8 P4.8 U1.9 | length 7916.5
  Top Layer w8: D2.1 3028.5,2408.5 3028.5,2519.83 3052,2543.33 3052,2968 3015,3005 3005,3005 2984,3026 2984,3079.03 2978,3085.03 2978,3154.97 2984,3160.97 2984,3387.62 2958,3413.62 2958,3874.97 2974,3890.97 2974,4025.38 2984,4035.38 2984,4122.62 2958,4148.62 2958,4698 2978,4718 2978,4719.97 3062,4803.97 3062,5102.4 3054,5110.4 3054,5176 v1(3020,5210) ; U1.9 3495.75,6345.75 3520,6370 3580,6370 3583.5,6366.5 3583.5,5767.31 3630.81,5720 3676.07,5720 3692.07,5704 3787.6,5704 3804,5687.6 3804,5520.56 3769.44,5486 3746.81,5486 3689.69,5428.88 3689.69,5210.31 v1(3690,5210)
  Bottom Layer w8: P1.8 2234,3716 2876.3,3716 2941.3,3651 v1(2971,3651) ; v1@2971,3641 3029,3699 3101.95,3699 3122.95,3720 3297.16,3720 3298.16,3719 4548.67,3719 4564.67,3703 4595.33,3703 4611.33,3719 4669,3719 P4.8 ; v1(3020,5210) 3027,5203 3683,5203 v1(3690,5210)
KEYINPUT7: D4.1 P1.9 P4.9 U1.10 | length 7899.8
  Top Layer w8: U1.10 3504.62,6377.24 3513.37,6386 3586.63,6386 3599.5,6373.12 3599.5,6319.41 3616,6302.91 3616,5764 v1(3646,5764) ; v1(4026,5764) 4026,5146.64 4012.5,5133.14 4012.5,4958.49 4048,4922.99 4048,4855.01 4038,4845.01 4038,4095.49 4045.5,4087.99 4045.5,4022.51 4038,4015.01 v1(4038,3660) 4038,3360.49 4045.5,3352.99 4045.5,3299.51 4038,3292.01 4038,2625.49 4045.5,2617.99 4045.5,2275.5 v1(4041,2280)
  Bottom Layer w8: P1.9 2869.67,3700 2955.67,3614 3039.58,3614 3125.58,3700 4040,3700 ; v1(3646,5764) v1(4026,5764) ; v1(4038,3660) 4038,3698 4040,3700 ; v1(4041,2280) 4420,2280 D4.1 ; P4.9 4614.95,3700 4601.95,3687 4558.05,3687 4545.05,3700 4040,3700
KEYINPUT8: D6.1 P1.10 P4.10 U1.11 | length 6435.5
  Top Layer w8: U1.11 3586.51,6408.74 3615.5,6379.75 3615.5,6326.03 3632,6309.54 3632,5820 3651,5801 3661.33,5801 3742.33,5720 3794.23,5720 3820,5694.23 3820,5513.93 3705.69,5399.62 3705.69,5248.85 3754,5200.54 3754,5118.4 3718,5082.4 3718,4783.97 3802,4699.97 3802,4381.4 3698,4277.4 3698,4242.6 3733,4207.6 3733,3929.97 3698,3894.97 3698,3825.03 3749,3774.03 3749,3748.16 3770,3727.16 3770,3569.4 3802,3537.4 3802,3502.6 3770,3470.6 3770,3130 D6.1
  Bottom Layer w8: P1.10 2152,3598 3770,3598 ; v1(3770,3630) 3770,3598 ; P4.10 4748,3598 3770,3598
KEYINPUT9: D8.1 P1.11 P4.11 U1.12 | length 7358
  Top Layer w8: P1.11 2108.47,3458.47 2108.47,3382.8 2154,3337.27 v1(2154,3086) ; U1.12 3577.65,6440.24 3631.5,6386.38 3631.5,6332.66 3648,6316.17 3648,5836.95 3748.95,5736 3800.85,5736 3836,5700.85 3836,5507.31 3721.69,5392.99 3721.69,5255.48 3770,5207.16 3770,5137.02 3802,5105.02 3802,4722.6 3818,4706.6 3818,4331.88 3782,4295.88 3782,4242.6 3758.09,4218.7 3758.09,4159.07 3802,4115.16 3802,4105.88 3770,4073.88 3770,3906.97 3782,3894.97 3782,3825.03 3775,3818.03 3775,3744.79 3818,3701.79 3818,3172 v1(3852,3172) ; P4.11 4800,3450 v1(4800,3120)
  Bottom Layer w8: v1(2154,3086) 2978,3086 2978,3085.03 2985.03,3078 3054.97,3078 3062,3085.03 3062,3090 3110,3138 3110,3180 3287.67,3180 3292.67,3175 3323.33,3175 3328.33,3180 4420,3180 D8.1 ; D8.1@4500,3140 D8.1 ; v1(4800,3120) D8.1
KEYINPUT10: D10.1 P1.12 P4.12 U1.23 | length 7171.6
  Top Layer w8: v1(3200,6410) 3202.24,6412.24 U1.23 ; v1(4300,6410) 4302,6408 4302,6120.03 4267,6085.03 4267,5548.41 4290.5,5524.91 4290.5,4923.51 4370,4844.01 4370,4744.12 4386,4728.12 4386,4244 4480,4150 D10.1 4490,3860 4540,3810 v1(4540,3400)
  Bottom Layer w8: P1.12 2610,3400 2692,3482 2884.04,3482 2904.04,3462 3099.67,3462 3104.67,3467 3135.33,3467 3140.33,3462 3560.96,3462 3580.96,3482 3624.04,3482 3644.04,3462 4298.46,3462 4318.46,3482 4361.54,3482 4443.54,3400 v1(4540,3400) P4.12 ; v1(3200,6410) v1(4300,6410)
KEYINPUT11: D12.1 U1.24 | length 3426.7
  Top Layer w8: U1.24 3170.75,6679.25 3155.25,6694.75 3155.25,6834.75 3190.5,6870 v1(3210,6870) ; v1(3780,6870) 3758,6848 3758,6445.23 3809,6394.23 3809,6337.07 3758,6286.07 3758,5862.72 3788.72,5832 3840.62,5832 3932,5740.62 3932,5146.79 3914,5128.79 3914,5050.12 3898,5034.12 3898,4762.36 3914,4746.36 3914,4686 v1(3940,4660)
  Bottom Layer w8: v1(3210,6870) v1(3780,6870) ; D12.1 3885,4665 3890,4660 v1(3940,4660)
KEYOUTPUT0: P2.4 P5.4 U1.25 | length 5432.9
  Top Layer w8: U1.25 3139.25,6844.3 3163.5,6868.55 3163.5,6891.18 3187,6914.67 3187,6937 v1(3210,6960) ; v1@3715.5,6973.7 3717.36,6971.84 3717.36,6440.61 3777,6380.97 3777,6350.32 3715.5,6288.82 3715.5,5859.96 3775.46,5800 3827.36,5800 3900,5727.36 3900,5403.37 v1@3809.62,5312.99
  Bottom Layer w8: P2.4 2235,5315 3602.67,5315 3614.67,5327 3645.33,5327 3657.33,5315 4486.67,5315 4496.17,5324.5 4542.17,5324.5 4564.67,5347 4619.63,5347 4672.63,5400 P5.4 ; v1(3210,6960) 3367.67,6960 3384.67,6943 3680.98,6943 v1(3713.59,6975.61) ; v1(3806.69,5312.99) v1@3806.69,5327.31
KEYOUTPUT1: P2.5 P5.5 U1.26 | length 5475.4
  Top Layer w8: U1.26 3113,6636.43 3113,6840.67 3137,6864.67 3137,6917 v1(3150,6930) ; v1(3760,6930) 3750,6930 3750,6892.33 3742,6884.33 3742,6438.6 3793,6387.6 3793,6343.69 3742,6292.69 3742,5856.09 3782.09,5816 3833.99,5816 3916,5733.99 3916,5396.75 3850,5330.75 3850,5270 v1(3880,5240)
  Bottom Layer w8: P2.5 2151,5299 3568.67,5299 3614.67,5253 3645.33,5253 3658.33,5240 3667.67,5240 3674.67,5247 3705.33,5247 3712.33,5240 4690,5240 P5.5 ; v1(3150,6930) 3157,6923 3743,6923 3750,6930 v1(3760,6930)
KEYOUTPUT2: P2.6 P5.6 U1.27 | length 5563.7
  Top Layer w8: v1(2260,6430) 2320,6490 2320,6827.67 2303,6844.67 2303,6877 v1(2280,6900) ; v1(2280,5810) 2280,5180 v1(2310,5150) ; U1.27 3076.26,6793.93 3097,6814.67 3097,6877 v1(3100,6880)
  Bottom Layer w8: P2.6 2197,5153 3015.33,5153 3049.33,5187 3660.67,5187 3674.67,5173 3705.33,5173 3732.33,5200 P5.6 ; v1(2260,6430) 2260,6410 2280,6390 v1(2280,5810) ; v1(2280,6900) 2300,6880 2307.67,6880 2324.67,6897 2355.33,6897 2372.33,6880 v1(3100,6880)
KEYOUTPUT3: P2.7 P5.7 U1.28 | length 5495.9
  Top Layer w8: v1(2340,5040) 2340,5127.67 2347,5134.67 2347,5803 v1(2340,5810) ; v1(2340,6430) v1(2340,6860) ; U1.28 3044.76,6752.44 3057,6764.67 3057,6827 v1(3060,6830)
  Bottom Layer w8: P2.7 2210,5040 2806.33,5040 2834.33,5068 2977.6,5068 3002.6,5043 3037.4,5043 3047.4,5053 3325.96,5053 3330.96,5048 3374.04,5048 3394.04,5068 3697.6,5068 3742.6,5023 3777.4,5023 3793.4,5039 4283.87,5039 4312.87,5068 4370.67,5068 4395.67,5043 4693,5043 P5.7 ; v1(2340,5810) v1(2340,6430) ; v1(2340,6860) 2459.68,6860 2489.68,6830 v1(3060,6830)
KEYOUTPUT4: P2.8 P5.8 U1.39 | length 4794.2
  Top Layer w8: v1(2190,5820) 2260,5750 2260,5020 v1(2260,5000) ; v1(2200,6390) 2200,6384.49 2198.26,6382.75 2848.32,6382.75 U1.39
  Bottom Layer w8: P2.8 2788.96,5000 2840.96,5052 2884.04,5052 2909.04,5027 3044.02,5027 3054.02,5037 3319.33,5037 3324.33,5032 3560.96,5032 3580.96,5052 3690.98,5052 3735.98,5007 3784.02,5007 3800.02,5023 4290.5,5023 4319.5,5052 4364.04,5052 4416.04,5000 P5.8 ; v1(2190,5820) 2192.76,5822.76 2192.76,6377.24 2200,6384.49 v1(2200,6390)
KEYOUTPUT5: P2.9 P5.9 U1.40 | length 4523.7
  Top Layer w8: v1(2568,4810) 2568,4922.99 2560.5,4930.49 2560.5,5121.54 2603,5164.04 2603,6005.33 2614.25,6016.58 v1(2614.25,6064.25) ; v1(2614.25,6345.75) U1.40
  Bottom Layer w8: P2.9 2240.5,4809.5 2447.17,4809.5 2464.67,4827 2495.33,4827 2532.33,4790 2770,4790 2780,4800 3520,4800 3530,4810 4115,4810 4125,4800 4275,4800 4291,4816 4666,4816 P5.9 ; v1(2614.25,6064.25) 2614.25,6193.42 2603.24,6204.44 2603.24,6235.09 2614.25,6246.11 v1(2614.25,6345.75)
KEYOUTPUT6: P2.10 P5.10 U1.49 | length 4275.3
  Top Layer w8: v1(2470,5260) 2470,4935.99 2457,4922.99 2457,4864.01 2470,4851.01 2470,4780 v1(2480,4790) ; v1(2800,5260) 2800,5810 2874,5884 2874,5886.63 2918.78,5931.41 U1.49
  Bottom Layer w8: P2.10 2177,4773 4723,4773 P5.10 ; v1(2470,5260) v1(2800,5260)
KEYOUTPUT7: P2.11 P5.11 U1.50 | length 4753.6
  Top Layer w8: v1(2430,4590) v1(2430,5190) ; v1(2890,5190) 2890,5880 2950.28,5940.28 U1.50
  Bottom Layer w8: P2.11 2318,4532 2349.67,4532 2374.67,4557 2405.33,4557 2430,4532.33 2430,4532 ; v1(2430,4590) 2430,4532 ; v1(2430,5190) v1(2890,5190) ; P5.11 4750,4680 4602,4532 2430,4532
KEYOUTPUT8: P2.12 P5.12 U1.59 | length 4985.4
  Top Layer w8: P2.12 P2.12@2167,4617 ; v1(2390,4520) 2393,4523 2393,4617 2393,5803 v1(2400,5810) ; v1(3233.74,5903.74) U1.59
  Bottom Layer w8: P2.12 2234,4516 4666,4516 P5.12 ; v1(2400,5810) 2493.74,5903.74 v1(3233.74,5903.74)
KEYOUTPUT9: SW1.1 SW2.1 SW3.1 SW4.1 SW5.1 SW7.1 SW8.1 SW9.1 SW10.1 SW11.1 SW12.1 SW13.1 U1.60 | length 9369.7
  Top Layer w8: v1(3150,2700) 3150,2820 3120,2850 v1(3120,3430) v1(3120,4165) v1(3120,5000) 3120,5491.19 3102,5509.19 3102,5662.81 3182.19,5743 3205.33,5743 3270.74,5808.41 3270.74,6023.31 U1.60
  Bottom Layer w8: SW1.1 2867.5,2700 v1(3150,2700) SW3.1@4335,2700 ; SW4.1 v1(3120,3430) SW5.1 SW8.1 ; SW7.1 v1(3120,4165) SW9.1 3624.5,4143 3895.33,4143 3915.33,4163 4338,4163 SW10.1 ; SW11.1 v1(3120,5000) SW12.1 3720.35,5000 3729.35,4991 3790.65,4991 3799.65,5000 SW13.1
LCD_DATA4: U1.31 U2.11 | length 586.3
  Top Layer w8: U1.31 2950.28,6707.4 2943,6714.67 2943,6745.33 2964.67,6767 2968,6767 2976.27,6775.27 2976.27,6788.59 3004.67,6817 3018,6817 3023,6822 3023,6845.33 3060,6882.33 3060,6892.33 3134.67,6967 3168,6967 3173,6972 3173,6975.33 3194.67,6997 3198,6997 U2.11
LCD_DATA5: U1.32 U2.12 | length 751.2
  Top Layer w8: U1.32 2918.78,6743.73 2960.27,6785.22 2960.27,6795.22 3004,6838.95 3004,6848.95 3044,6888.95 3044,6898.95 3128.05,6983 3158.05,6983 3188.05,7013 3191.37,7013 3213,7034.63 3213,7071.4 3237.6,7096 3272.4,7096 3314.4,7054 U2.12
LCD_DATA6: U1.35 U2.13 | length 1301.5
  Top Layer w8: v1(2760,6670) 2760,6697.67 2777,6714.67 v1(2777,6967) ; v1@2773.23,6503.23 U1.35 ; v1(3400,6980) 3400,6999 U2.13
  Bottom Layer w8: v1(2760,6490) v1(2760,6670) ; v1(2777,6967) 3164.67,6967 3194.67,6997 3225.33,6997 3246.33,6976 v1@3396,6976
LCD_DATA7: U1.36 U2.14 | length 1728.4
  Top Layer w8: v1(2660,6980) 2670,6970 2670,6802.33 2663,6795.33 2663,6677 v1(2670,6670) ; v1(2677,6453) 2775.33,6453 2794.06,6471.73 U1.36
  Bottom Layer w8: v1(2660,6980) 2737.67,6980 2761.67,7004 2792.33,7004 2813.33,6983 3158.05,6983 3188.05,7013 3231.95,7013 3252.95,6992 3359.67,6992 3384.67,7017 3415.33,7017 3440.33,6992 3532,6992 3555,7015 U2.14 ; v1(2670,6670) 2677,6663 v1(2677,6453)
LED_GND: Q3.3 SW1.4 SW2.4 SW3.4 SW4.4 SW5.4 SW7.4 SW8.4 SW9.4 SW10.4 SW11.4 SW12.4 SW13.4 | length 10394
  Top Layer w8: SW1.4 2662.5,2467.5 2600,2530 2600,2708.96 2664.5,2773.46 2664.5,3128 SW4.4 2662.5,3222.5 2605,3280 2605,3448.96 2664.5,3508.46 2664.5,3863 SW7.4 2662.5,3947.5 2600,4010 2600,4178.96 2664.5,4243.46 2664.5,4323.17 2657,4330.67 v1(2657,4450) 2657,4516.67 2671,4530.67 2671,4561.33 2662.5,4569.83 SW11.4 ; SW2.4 3402.5,2477.5 3340,2540 3340,2708.96 3404.5,2773.46 3404.5,3128 SW5.4 3402.5,3212.5 3350,3265 3350,3453.96 3404.5,3508.46 3404.5,3863 SW9.4 3402.5,3957.5 3350,4010 3350,4166.33 3420.5,4236.83 3420.5,4293.17 3404.5,4309.17 SW12.4@3404.5,4698 ; SW3.4 4140,2460 4080,2520 4080,2711.46 4142,2773.46 4142,3128 SW8.4 4140,3210 4085,3265 4085,3451.46 4142,3508.46 4142,3863 SW10.4 4140,3955 4090,4005 4090,4191.46 4142,4243.46 4142,4699.5 SW13.4
  Top Layer w20: v1(4140,4450) 4070,4520 4070,5040.48 4034.5,5075.98 4034.5,5124.02 4070,5159.52 4070,5450 4200,5580 v1(4230,5580) ; v1(4320,5580) 4314.17,5580 4312.09,5577.91 Q3.3
  Bottom Layer w20: v1(2657,4450) v1(3410,4450) v1(4140,4450) ; v1(4230,5580) 4232.09,5577.91 4317.91,5577.91 v1(4320,5580)
NetC9_1: C9.1 U1.55 | length 100.8
  Top Layer w8: C9.1 3107.76,5934.76 U1.55
NetC12_1: C12.1 R26.1 | length 71.4
  Top Layer w8: C12.1 4205,1873 R26.1
NetD1_2: D1.2 HD1.3 Q1.3 | length 729.9
  Top Layer w25: D1.2 3865,6795 3928.5,6858.5 3928.5,6959.56 3910,6978.06 HD1.3
  Bottom Layer w25: D1.2 3935,6795 4070,6660 Q1.3
NetD2_2: D2.2 SW1.2 | length 399.6
  Bottom Layer w8: SW1.2 3005,2795 D2.2
NetD3_2: D3.2 SW2.2 | length 407.9
  Bottom Layer w8: SW2.2 3725,2795 D3.2
NetD4_2: D4.2 SW3.2 | length 412.8
  Bottom Layer w8: SW3.2 4425,2795 D4.2
NetD5_2: D5.2 SW4.2 | length 411.6
  Bottom Layer w8: SW4.2 3010,3530 D5.2
NetD6_2: D6.2 SW5.2 | length 411.6
  Bottom Layer w8: SW5.2 3750,3530 D6.2
NetD7_2: D7.2 SW7.2 | length 397.9
  Bottom Layer w8: SW7.2 2975,4265 D7.2
NetD8_2: D8.2 SW8.2 | length 394.1
  Bottom Layer w8: SW8.2 4470,3530 D8.2
NetD9_2: D9.2 SW9.2 | length 389.6
  Bottom Layer w8: SW9.2 3735,4265 D9.2
NetD10_2: D10.2 SW10.2 | length 392.1
  Bottom Layer w8: SW10.2 4475,4265 D10.2
NetD11_2: D11.2 SW11.2 | length 413.7
  Bottom Layer w8: SW11.2 3005,5100 D11.2
NetD12_2: D12.2 SW12.2 | length 422
  Bottom Layer w8: SW12.2 3725,5100 D12.2
NetD13_2: D13.2 SW13.2 | length 393.7
  Bottom Layer w8: SW13.2 4465,5100 D13.2
NetJS*1_7: JS*1.7 JS*1.8 R27.1 | length 328.5
  Top Layer w20: JS*1.8 3230,1660 ; JS*1.7 3230,1660 ; R27.1 3230,1660
NetLD1_1: LD1.1 R5.2 | length 73.2
  Top Layer w8: R5.2 4749.33,6362.17 LD1.1@4749.33,6300
NetLD2_1: LD2.1 R6.2 | length 83.2
  Top Layer w8: R6.2 4741.5,6447.83 LD2.1@4749.33,6440
NetLD3_1: LD3.1 R7.2 | length 83.2
  Top Layer w8: R7.2 4741.5,6607.83 LD3.1@4749.33,6600
NetQ1_1: Q1.1 Q2.3 R2.1 | length 882.9
  Top Layer w8: R2.1 4482.4,5816.1 Q2.3
  Top Layer w20: Q1.1 4370,5870 4415,5825 R2.1
NetQ2_1: Q2.1 R4.2 | length 104.8
  Top Layer w8: R4.2 4356.5,5665 Q2.1
NetQ3_1: Q3.1 R8.2 | length 82.6
  Top Layer w8: Q3.1@4426.5,5493.5 Q3.1
  Top Layer w20: Q3.1 4448.5,5471.5 R8.2
NetR9_2: R9.2 SW1.3 | length 123.1
  Top Layer w8: SW1.3 2776,2408.5 R9.2
NetR10_2: R10.2 SW2.3 | length 100.2
  Top Layer w8: SW2.3 3509,2388.5 R10.2
NetR12_2: R12.2 SW3.3 | length 136.8
  Top Layer w8: SW3.3 4256.5,2378.5 R12.2
NetR13_2: R13.2 SW6.3 SW6.4 | length 305.3
  Top Layer w8: SW6.4 2434,6610.5 R13.2 2434,6729.5 SW6.3
NetR14_2: R14.2 SW4.3 | length 78.1
  Top Layer w8: SW4.3 2838.5,3130 R14.2
NetR15_2: R15.2 SW5.3 | length 98.1
  Top Layer w8: SW5.3 3504,3128.5 R15.2
NetR16_2: R16.2 SW7.3 | length 79
  Top Layer w8: SW7.3 2766,3868.5 R16.2
NetR17_2: R17.2 SW8.3 | length 100.6
  Top Layer w8: SW8.3 4241.5,3128.5 R17.2
NetR18_2: R18.2 SW9.3 | length 79
  Top Layer w8: SW9.3 3576.5,3865 R18.2
NetR19_2: R19.2 SW10.3 | length 81.5
  Top Layer w8: SW10.3 4316.5,3865 R19.2
NetR20_2: R20.2 SW11.3 | length 81
  Top Layer w8: SW11.3 2771,4708.5 R20.2
NetR21_2: R21.2 SW12.3 | length 81
  Top Layer w8: SW12.3 3511,4708.5 R21.2
NetR22_1: R22.1 R24.2 U2.3 | length 175.2
  Top Layer w8: R22.1 2465,6960 ; U2.3 2465,7044 2465,6960 ; R24.2 2465,6960
NetR23_2: R23.2 SW13.3 | length 81
  Top Layer w8: SW13.3 4251,4708.5 R23.2
NetR25_1: R25.1 U2.15 | length 97
  Top Layer w8: R25.1 3655,7006.5 U2.15
NRESET: C3.1 HD5.15 R11.1 R13.1 U1.52 | length 2413.9
  Top Layer w8: v1(2550,5690) 2560,5700 v1(2560,6030) ; C3.1 2556.5,6745.5 R13.1 2553.5,6667.01 R11.1 2553.5,6436.5 v1(2570,6420) ; U1.52 v1@3013.27,6416.73
  Bottom Layer w8: v1(2550,5690) 3000,5690 HD5.15 ; v1(2560,6030) 2570,6040 v1(2570,6420) ; v1@2580,6410 2730,6410 2740,6420 v1(3010,6420)
RS: U1.29 U2.4 | length 955.7
  Top Layer w8: U2.4 2584,7054 2630,7100 2700,7100 v1(2700,6780) ; U1.29 3017,6634.91 3017,6777 v1(3020,6780)
  Bottom Layer w8: v1(2700,6780) v1(3020,6780)
SWDCLK: HD5.9 U1.57 | length 637.8
  Top Layer w8: v1(3102,5738) 3143,5779 3143,5792.03 3180,5829.03 3180,5940 3170.75,5949.25 U1.57
  Bottom Layer w8: v1(3102,5738) 3102,5688 3288,5688 3331,5645 HD5.9
SWDIO: HD5.7 U1.58 | length 600
  Top Layer w8: v1(3190,5780) 3196,5786 3196,6022.57 U1.58 ; v1(3380,5770) 3380,5710 HD5.7
  Bottom Layer w8: v1(3190,5780) 3370,5780 v1(3380,5770)
pads on no net: HD1.4 HD2.4 HD2.10 HD2.11 HD2.12 HD2.13 HD5.3 HD5.5 HD5.11 HD5.13 HD5.17 HD5.19 SW1.5 SW1.6 SW1.7 SW2.5 SW2.6 SW2.7 SW3.5 SW3.6 SW3.7 SW4.5 SW4.6 SW4.7 SW5.5 SW5.6 SW5.7 SW7.5 SW7.6 SW7.7 SW8.5 SW8.6 SW8.7 SW9.5 SW9.6 SW9.7 SW10.5 SW10.6 SW10.7 SW11.5 SW11.6 SW11.7 SW12.5 SW12.6 SW12.7 SW13.5 SW13.6 SW13.7 U1.3 U1.4 U1.16 U1.17 U1.18 U1.19 U1.20 U1.37 U1.38 U1.41 U1.42 U1.43 U1.53 U2.7 U2.8 U2.9 U2.10

## Keep-outs
Keep-Out Layer:
  lines w10: 2050,1300 4850,1300 4850,7135 2050,7135 2050,1300

## Silkscreen, mask and mechanical layers (free items; w line width, h text height)
Top Overlay:
  text "Created By:" at 2090,2100 h60
  text "Rev1" at 2595,1950 h60
  text "あ" at 2280,1920 h200
  text "9/18/14" at 2590,1855 h60
  text "し" at 2300,1750 h200
  text "Documentation" at 2490,1675 h60
  text "at Github.com" at 2490,1590 h60
  text "た" at 2280,1580 h200
  text "Project" at 2495,1515 h50
  text "か" at 2290,1420 h200
  text "ULTIMATE DEVELOPER KEYBOARD" at 2780,1420 h60
Drill Drawing:
  text ".LEGEND" at 6000,3200 h60
  text "Drill Drawing." at 6000,3100 h60

## Dimensions
2000,1270 to 2000,7170 on Mechanical 1
2050,1230 to 4850,1240 on Mechanical 1

## Text inside footprints (layer, text, board x,y; h text height)
HD1: Top Overlay "1" at 4260,7081.5 h37.5 r180
J1: Mechanical 1 "Mech 2 - Clearance, move to internal plane if present" at 4724.44,7348.74 h11.81 r270; Mechanical 1 "Mech 1 - Slot cut-out" at 4744.13,7348.74 h11.81 r270; Mechanical 1 "Assign keep-out area to slot" at 4783.5,7348.74 h11.81 r270; Mechanical 1 "Alert PCB fab to slot details" at 4763.81,7348.74 h11.81 r270
LD1: Top Overlay "A" at 4659.96,6314.76 h29.53 r180
LD2: Top Overlay "A" at 4630,6430 h29.53
LD3: Top Overlay "A" at 4640,6590 h29.53
Q1: Top Overlay "3" at 4090,6730 h40 r180; Top Overlay "2" at 4240,6730 h40 r180; Top Overlay "1" at 4380,6730 h40 r180
SW1: Bottom Overlay "1" at 2942.5,2715 h60; Bottom Overlay "LED" at 2797.5,2285 h60
SW2: Bottom Overlay "1" at 3682.5,2715 h60; Bottom Overlay "LED" at 3537.5,2285 h60
SW3: Bottom Overlay "1" at 4420,2715 h60; Bottom Overlay "LED" at 4275,2285 h60
SW4: Bottom Overlay "1" at 2942.5,3450 h60; Bottom Overlay "LED" at 2797.5,3020 h60
SW5: Bottom Overlay "1" at 3682.5,3450 h60; Bottom Overlay "LED" at 3537.5,3020 h60
SW7: Bottom Overlay "1" at 2942.5,4185 h60; Bottom Overlay "LED" at 2690,3752 h60
SW8: Bottom Overlay "1" at 4420,3450 h60; Bottom Overlay "LED" at 4275,3020 h60
SW9: Bottom Overlay "1" at 3682.5,4185 h60; Bottom Overlay "LED" at 3530,3735 h60
SW10: Bottom Overlay "1" at 4420,4185 h60; Bottom Overlay "LED" at 4275,3755 h60
SW11: Bottom Overlay "1" at 2942.5,5020 h60; Bottom Overlay "LED" at 2740,4590 h60
SW12: Bottom Overlay "1" at 3682.5,5020 h60; Bottom Overlay "LED" at 3460,4590 h60
SW13: Bottom Overlay "1" at 4422.5,5020 h60; Bottom Overlay "LED" at 4200,4590 h60
U2: Bottom Overlay "1" at 2220,7114 h30 r90